# Altium PCB SoM_MT7621.PcbDoc
Units mm, origin at the board's own origin, x right, y up, seen from the top; angles counter-clockwise.
Board outline 50.14 x 50.14 mm, 2 copper layers (Top Layer, Bottom Layer); 140 components, 0 nets, 140 pads, 0 vias.
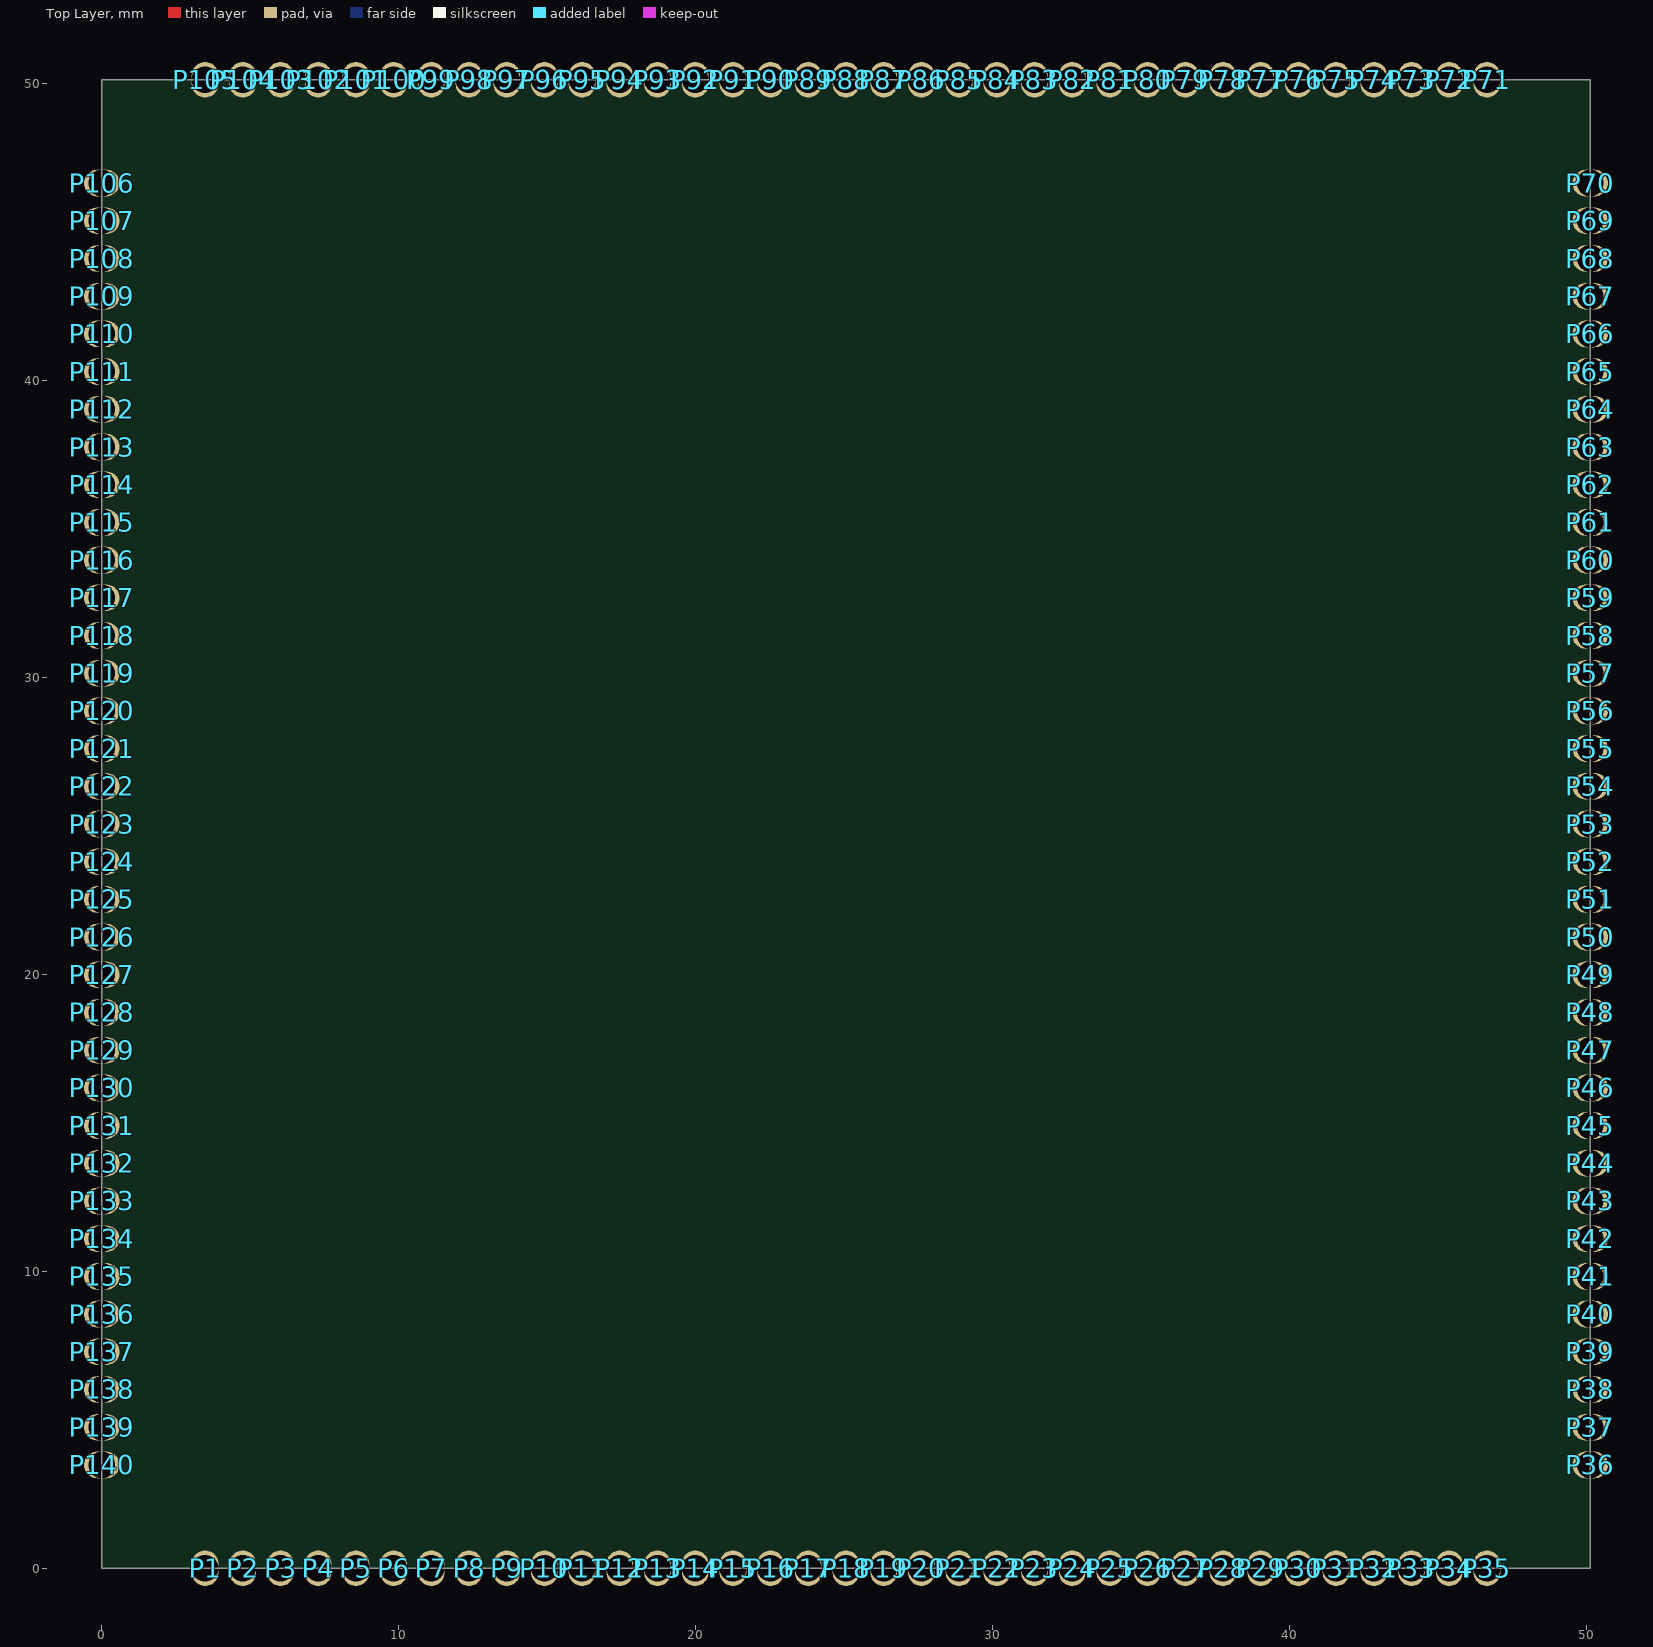
[diagram p0: Top Layer view]
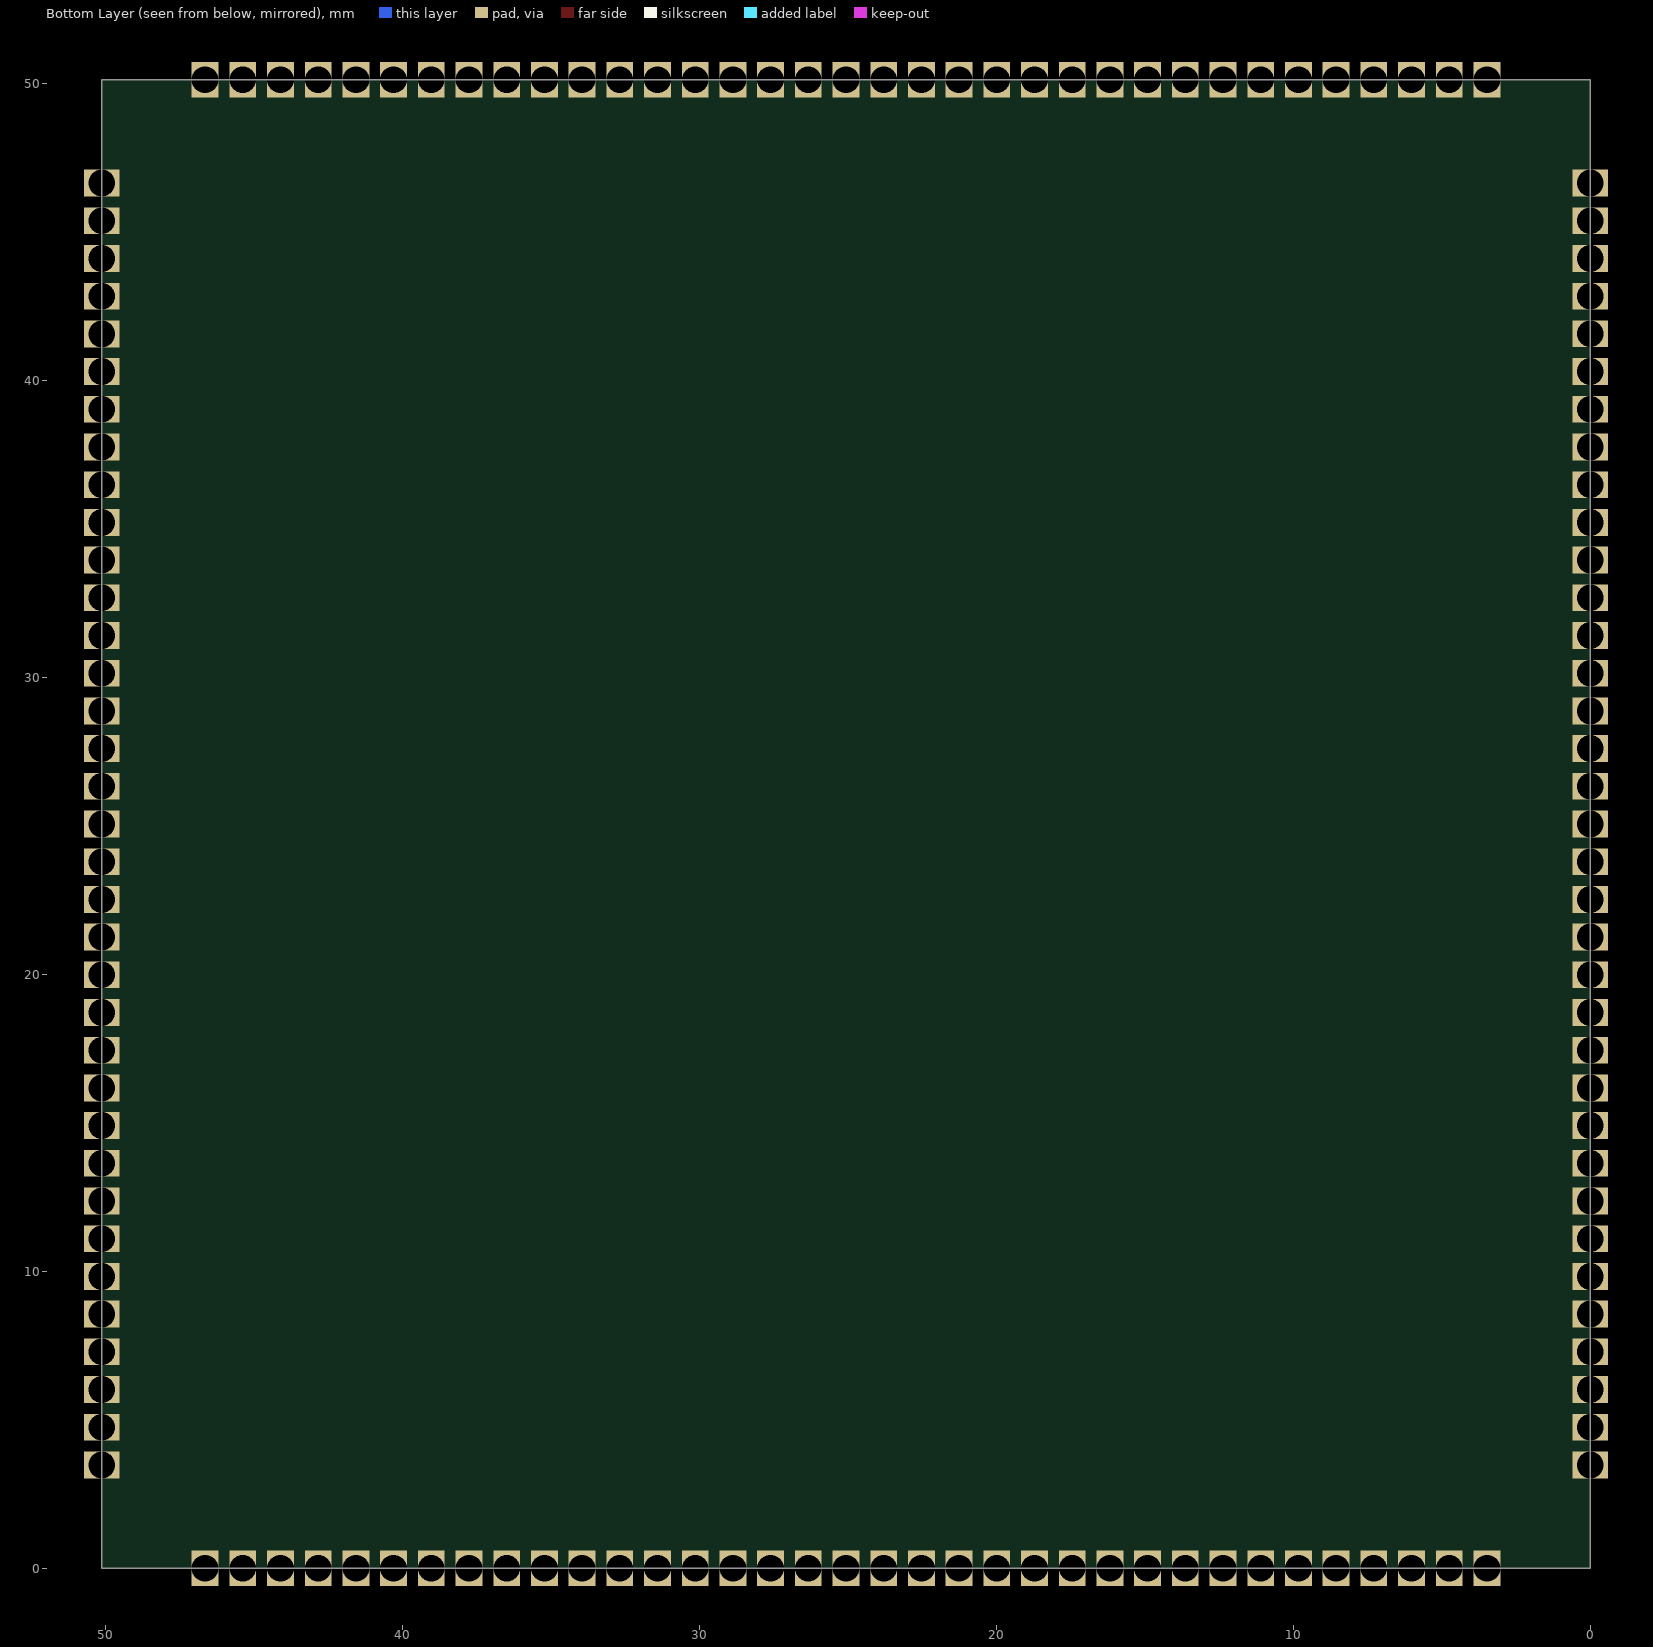
[diagram p1: Bottom Layer view, seen from below]

## Layer stack, top to bottom
Top Solder: solder mask 0.0102, Solder Resist, Dk 3.5
Top Layer: signal copper 0.0356
Dielectric 1: dielectric 0.32, FR-4, Dk 4.8
Bottom Layer: signal copper 0.0356
Bottom Solder: solder mask 0.0102, Solder Resist, Dk 3.5

## Board outline
0,0 0,50.143 50.143,50.143 50.143,0

## Design rules (kind name [scope] priority, off if disabled: settings)
Clearance [All] p1: gap=0.254 ignorepadtopadclearanceinfootprint=FALSE except(0: Arc-Hole Track-Hole SMDPad-Hole THPad-Hole Via-Hole Fill-Hole Poly-Hole Region-Hole Text-Hole)
PolygonConnect [All] p1: connectstyle=Relief reliefconductorwidth=0.254 reliefentries=4 polygonreliefangle="90 Angle" airgapwidth=0.254
RoutingVias [All] p1: holewidth=0.711 width=1.27 viastyle="Through Hole" minholewidth=0.711 minwidth=1.27 maxholewidth=0.711 maxwidth=1.27
SolderMaskExpansion [All] p1: expansion=0.102 istentingtop=FALSE
Width [All] p1: maxlimit=0.254 minlimit=0.254 preferedwidth=0.254
30 further rules are at their usual default settings.

## Components (designator, comment, footprint, x,y, rotation, side; value= is the part's Value field where it differs from the comment)
P1 "Castellated Pad" Half_Hole 3.482,0 r0 top
P2 "Castellated Pad" Half_Hole 4.752,0 r0 top
P3 "Castellated Pad" Half_Hole 6.022,0 r0 top
P4 "Castellated Pad" Half_Hole 7.292,0 r0 top
P5 "Castellated Pad" Half_Hole 8.562,0 r0 top
P6 "Castellated Pad" Half_Hole 9.832,0 r0 top
P7 "Castellated Pad" Half_Hole 11.102,0 r0 top
P8 "Castellated Pad" Half_Hole 12.372,0 r0 top
P9 "Castellated Pad" Half_Hole 13.642,0 r0 top
P10 "Castellated Pad" Half_Hole 14.912,0 r0 top
P11 "Castellated Pad" Half_Hole 16.182,0 r0 top
P12 "Castellated Pad" Half_Hole 17.452,0 r0 top
P13 "Castellated Pad" Half_Hole 18.722,0 r0 top
P14 "Castellated Pad" Half_Hole 19.992,0 r0 top
P15 "Castellated Pad" Half_Hole 21.262,0 r0 top
P16 "Castellated Pad" Half_Hole 22.532,0 r0 top
P17 "Castellated Pad" Half_Hole 23.802,0 r0 top
P18 "Castellated Pad" Half_Hole 25.072,0 r0 top
P19 "Castellated Pad" Half_Hole 26.342,0 r0 top
P20 "Castellated Pad" Half_Hole 27.612,0 r0 top
P21 "Castellated Pad" Half_Hole 28.882,0 r0 top
P22 "Castellated Pad" Half_Hole 30.152,0 r0 top
P23 "Castellated Pad" Half_Hole 31.422,0 r0 top
P24 "Castellated Pad" Half_Hole 32.692,0 r0 top
P25 "Castellated Pad" Half_Hole 33.962,0 r0 top
P26 "Castellated Pad" Half_Hole 35.232,0 r0 top
P27 "Castellated Pad" Half_Hole 36.502,0 r0 top
P28 "Castellated Pad" Half_Hole 37.772,0 r0 top
P29 "Castellated Pad" Half_Hole 39.042,0 r0 top
P30 "Castellated Pad" Half_Hole 40.312,0 r0 top
P31 "Castellated Pad" Half_Hole 41.582,0 r0 top
P32 "Castellated Pad" Half_Hole 42.852,0 r0 top
P33 "Castellated Pad" Half_Hole 44.122,0 r0 top
P34 "Castellated Pad" Half_Hole 45.392,0 r0 top
P35 "Castellated Pad" Half_Hole 46.662,0 r0 top
P36 "Castellated Pad" Half_Hole 50.143,3.482 r90 top
P37 "Castellated Pad" Half_Hole 50.143,4.752 r90 top
P38 "Castellated Pad" Half_Hole 50.143,6.022 r90 top
P39 "Castellated Pad" Half_Hole 50.143,7.292 r90 top
P40 "Castellated Pad" Half_Hole 50.143,8.562 r90 top
P41 "Castellated Pad" Half_Hole 50.143,9.832 r90 top
P42 "Castellated Pad" Half_Hole 50.143,11.102 r90 top
P43 "Castellated Pad" Half_Hole 50.143,12.372 r90 top
P44 "Castellated Pad" Half_Hole 50.143,13.642 r90 top
P45 "Castellated Pad" Half_Hole 50.143,14.912 r90 top
P46 "Castellated Pad" Half_Hole 50.143,16.182 r90 top
P47 "Castellated Pad" Half_Hole 50.143,17.452 r90 top
P48 "Castellated Pad" Half_Hole 50.143,18.722 r90 top
P49 "Castellated Pad" Half_Hole 50.143,19.992 r90 top
P50 "Castellated Pad" Half_Hole 50.143,21.262 r90 top
P51 "Castellated Pad" Half_Hole 50.143,22.532 r90 top
P52 "Castellated Pad" Half_Hole 50.143,23.802 r90 top
P53 "Castellated Pad" Half_Hole 50.143,25.072 r90 top
P54 "Castellated Pad" Half_Hole 50.143,26.342 r90 top
P55 "Castellated Pad" Half_Hole 50.143,27.612 r90 top
P56 "Castellated Pad" Half_Hole 50.143,28.882 r90 top
P57 "Castellated Pad" Half_Hole 50.143,30.152 r90 top
P58 "Castellated Pad" Half_Hole 50.143,31.422 r90 top
P59 "Castellated Pad" Half_Hole 50.143,32.692 r90 top
P60 "Castellated Pad" Half_Hole 50.143,33.962 r90 top
P61 "Castellated Pad" Half_Hole 50.143,35.232 r90 top
P62 "Castellated Pad" Half_Hole 50.143,36.502 r90 top
P63 "Castellated Pad" Half_Hole 50.143,37.772 r90 top
P64 "Castellated Pad" Half_Hole 50.143,39.042 r90 top
P65 "Castellated Pad" Half_Hole 50.143,40.312 r90 top
P66 "Castellated Pad" Half_Hole 50.143,41.582 r90 top
P67 "Castellated Pad" Half_Hole 50.143,42.852 r90 top
P68 "Castellated Pad" Half_Hole 50.143,44.122 r90 top
P69 "Castellated Pad" Half_Hole 50.143,45.392 r90 top
P70 "Castellated Pad" Half_Hole 50.143,46.662 r90 top
P71 "Castellated Pad" Half_Hole 46.662,50.143 r180 top
P72 "Castellated Pad" Half_Hole 45.392,50.143 r180 top
P73 "Castellated Pad" Half_Hole 44.122,50.143 r180 top
P74 "Castellated Pad" Half_Hole 42.852,50.143 r180 top
P75 "Castellated Pad" Half_Hole 41.582,50.143 r180 top
P76 "Castellated Pad" Half_Hole 40.312,50.143 r180 top
P77 "Castellated Pad" Half_Hole 39.042,50.143 r180 top
P78 "Castellated Pad" Half_Hole 37.772,50.143 r180 top
P79 "Castellated Pad" Half_Hole 36.502,50.143 r180 top
P80 "Castellated Pad" Half_Hole 35.232,50.143 r180 top
P81 "Castellated Pad" Half_Hole 33.962,50.143 r180 top
P82 "Castellated Pad" Half_Hole 32.692,50.143 r180 top
P83 "Castellated Pad" Half_Hole 31.422,50.143 r180 top
P84 "Castellated Pad" Half_Hole 30.152,50.143 r180 top
P85 "Castellated Pad" Half_Hole 28.882,50.143 r180 top
P86 "Castellated Pad" Half_Hole 27.612,50.143 r180 top
P87 "Castellated Pad" Half_Hole 26.342,50.143 r180 top
P88 "Castellated Pad" Half_Hole 25.072,50.143 r180 top
P89 "Castellated Pad" Half_Hole 23.802,50.143 r180 top
P90 "Castellated Pad" Half_Hole 22.532,50.143 r180 top
P91 "Castellated Pad" Half_Hole 21.262,50.143 r180 top
P92 "Castellated Pad" Half_Hole 19.992,50.143 r180 top
P93 "Castellated Pad" Half_Hole 18.722,50.143 r180 top
P94 "Castellated Pad" Half_Hole 17.452,50.143 r180 top
P95 "Castellated Pad" Half_Hole 16.182,50.143 r180 top
P96 "Castellated Pad" Half_Hole 14.912,50.143 r180 top
P97 "Castellated Pad" Half_Hole 13.642,50.143 r180 top
P98 "Castellated Pad" Half_Hole 12.372,50.143 r180 top
P99 "Castellated Pad" Half_Hole 11.102,50.143 r180 top
P100 "Castellated Pad" Half_Hole 9.832,50.143 r180 top
P101 "Castellated Pad" Half_Hole 8.562,50.143 r180 top
P102 "Castellated Pad" Half_Hole 7.292,50.143 r180 top
P103 "Castellated Pad" Half_Hole 6.022,50.143 r180 top
P104 "Castellated Pad" Half_Hole 4.752,50.143 r180 top
P105 "Castellated Pad" Half_Hole 3.482,50.143 r180 top
P106 "Castellated Pad" Half_Hole 0,46.662 r270 top
P107 "Castellated Pad" Half_Hole 0,45.392 r270 top
P108 "Castellated Pad" Half_Hole 0,44.122 r270 top
P109 "Castellated Pad" Half_Hole 0,42.852 r270 top
P110 "Castellated Pad" Half_Hole 0,41.582 r270 top
P111 "Castellated Pad" Half_Hole 0,40.312 r270 top
P112 "Castellated Pad" Half_Hole 0,39.042 r270 top
P113 "Castellated Pad" Half_Hole 0,37.772 r270 top
P114 "Castellated Pad" Half_Hole 0,36.502 r270 top
P115 "Castellated Pad" Half_Hole 0,35.232 r270 top
P116 "Castellated Pad" Half_Hole 0,33.962 r270 top
P117 "Castellated Pad" Half_Hole 0,32.692 r270 top
P118 "Castellated Pad" Half_Hole 0,31.422 r270 top
P119 "Castellated Pad" Half_Hole 0,30.152 r270 top
P120 "Castellated Pad" Half_Hole 0,28.882 r270 top
P121 "Castellated Pad" Half_Hole 0,27.612 r270 top
P122 "Castellated Pad" Half_Hole 0,26.342 r270 top
P123 "Castellated Pad" Half_Hole 0,25.072 r270 top
P124 "Castellated Pad" Half_Hole 0,23.802 r270 top
P125 "Castellated Pad" Half_Hole 0,22.532 r270 top
P126 "Castellated Pad" Half_Hole 0,21.262 r270 top
P127 "Castellated Pad" Half_Hole 0,19.992 r270 top
P128 "Castellated Pad" Half_Hole 0,18.722 r270 top
P129 "Castellated Pad" Half_Hole 0,17.452 r270 top
P130 "Castellated Pad" Half_Hole 0,16.182 r270 top
P131 "Castellated Pad" Half_Hole 0,14.912 r270 top
P132 "Castellated Pad" Half_Hole 0,13.642 r270 top
P133 "Castellated Pad" Half_Hole 0,12.372 r270 top
P134 "Castellated Pad" Half_Hole 0,11.102 r270 top
P135 "Castellated Pad" Half_Hole 0,9.832 r270 top
P136 "Castellated Pad" Half_Hole 0,8.562 r270 top
P137 "Castellated Pad" Half_Hole 0,7.292 r270 top
P138 "Castellated Pad" Half_Hole 0,6.022 r270 top
P139 "Castellated Pad" Half_Hole 0,4.752 r270 top
P140 "Castellated Pad" Half_Hole 0,3.482 r270 top

## Footprints (in the part's own frame and the unit in brackets; to place one, negate y for a bottom-side part, rotate by r counter-clockwise, add the part's x,y. Pads: shape width x height; smd on the part's side, far side on the other; paste and mask are expansions set on the pad)
Half_Hole [mm]
  oval 0.9x1.2 / inner oval 0.9x1.2 / far side rect 0.9x1.2 hole 0.9 mask+0.102: 0(0,0)

## Nets (pads, with @x,y where several pads share a name; then routed paths per layer and width w, separated by ;. In a path a pad name is that pad's centre, name@x,y a point inside that pad or via, vN(x,y) a via of type N, cw(c..) or ccw(c..) an arc to the next point about the centre after c; other vN are vias at no path point)
pads on no net: P1.0 P2.0 P3.0 P4.0 P5.0 P6.0 P7.0 P8.0 P9.0 P10.0 P11.0 P12.0 P13.0 P14.0 P15.0 P16.0 P17.0 P18.0 P19.0 P20.0 P21.0 P22.0 P23.0 P24.0 P25.0 P26.0 P27.0 P28.0 P29.0 P30.0 P31.0 P32.0 P33.0 P34.0 P35.0 P36.0 P37.0 P38.0 P39.0 P40.0 P41.0 P42.0 P43.0 P44.0 P45.0 P46.0 P47.0 P48.0 P49.0 P50.0 P51.0 P52.0 P53.0 P54.0 P55.0 P56.0 P57.0 P58.0 P59.0 P60.0 P61.0 P62.0 P63.0 P64.0 P65.0 P66.0 P67.0 P68.0 P69.0 P70.0 P71.0 P72.0 P73.0 P74.0 P75.0 P76.0 P77.0 P78.0 P79.0 P80.0 P81.0 P82.0 P83.0 P84.0 P85.0 P86.0 P87.0 P88.0 P89.0 P90.0 P91.0 P92.0 P93.0 P94.0 P95.0 P96.0 P97.0 P98.0 P99.0 P100.0 P101.0 P102.0 P103.0 P104.0 P105.0 P106.0 P107.0 P108.0 P109.0 P110.0 P111.0 P112.0 P113.0 P114.0 P115.0 P116.0 P117.0 P118.0 P119.0 P120.0 P121.0 P122.0 P123.0 P124.0 P125.0 P126.0 P127.0 P128.0 P129.0 P130.0 P131.0 P132.0 P133.0 P134.0 P135.0 P136.0 P137.0 P138.0 P139.0 P140.0

## Silkscreen, mask and mechanical layers (free items; w line width, h text height)
Board:
  lines w0.127: 0,0 3.482,0 50.143,0 50.143,3.482 50.143,50.143 3.482,50.143 0,50.143 0,3.482 0,0